# EAGLE board Bridge (EAGLE 9.2.2)
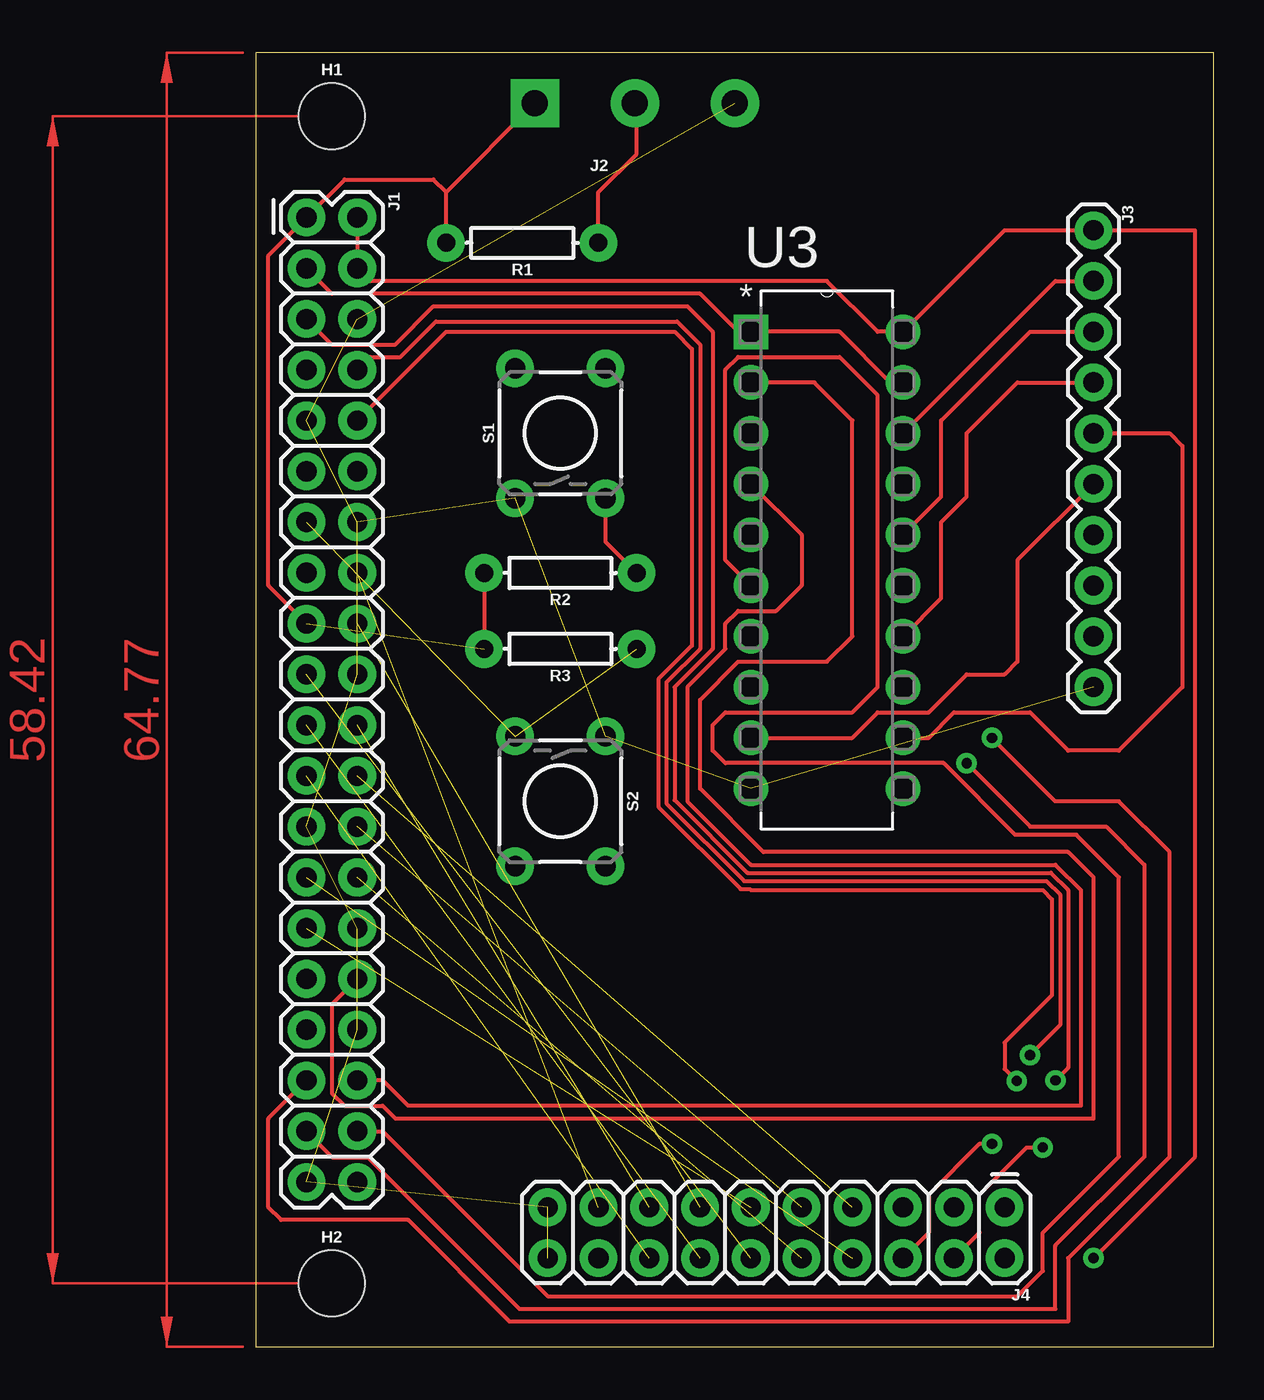
[diagram p0: board, top side]
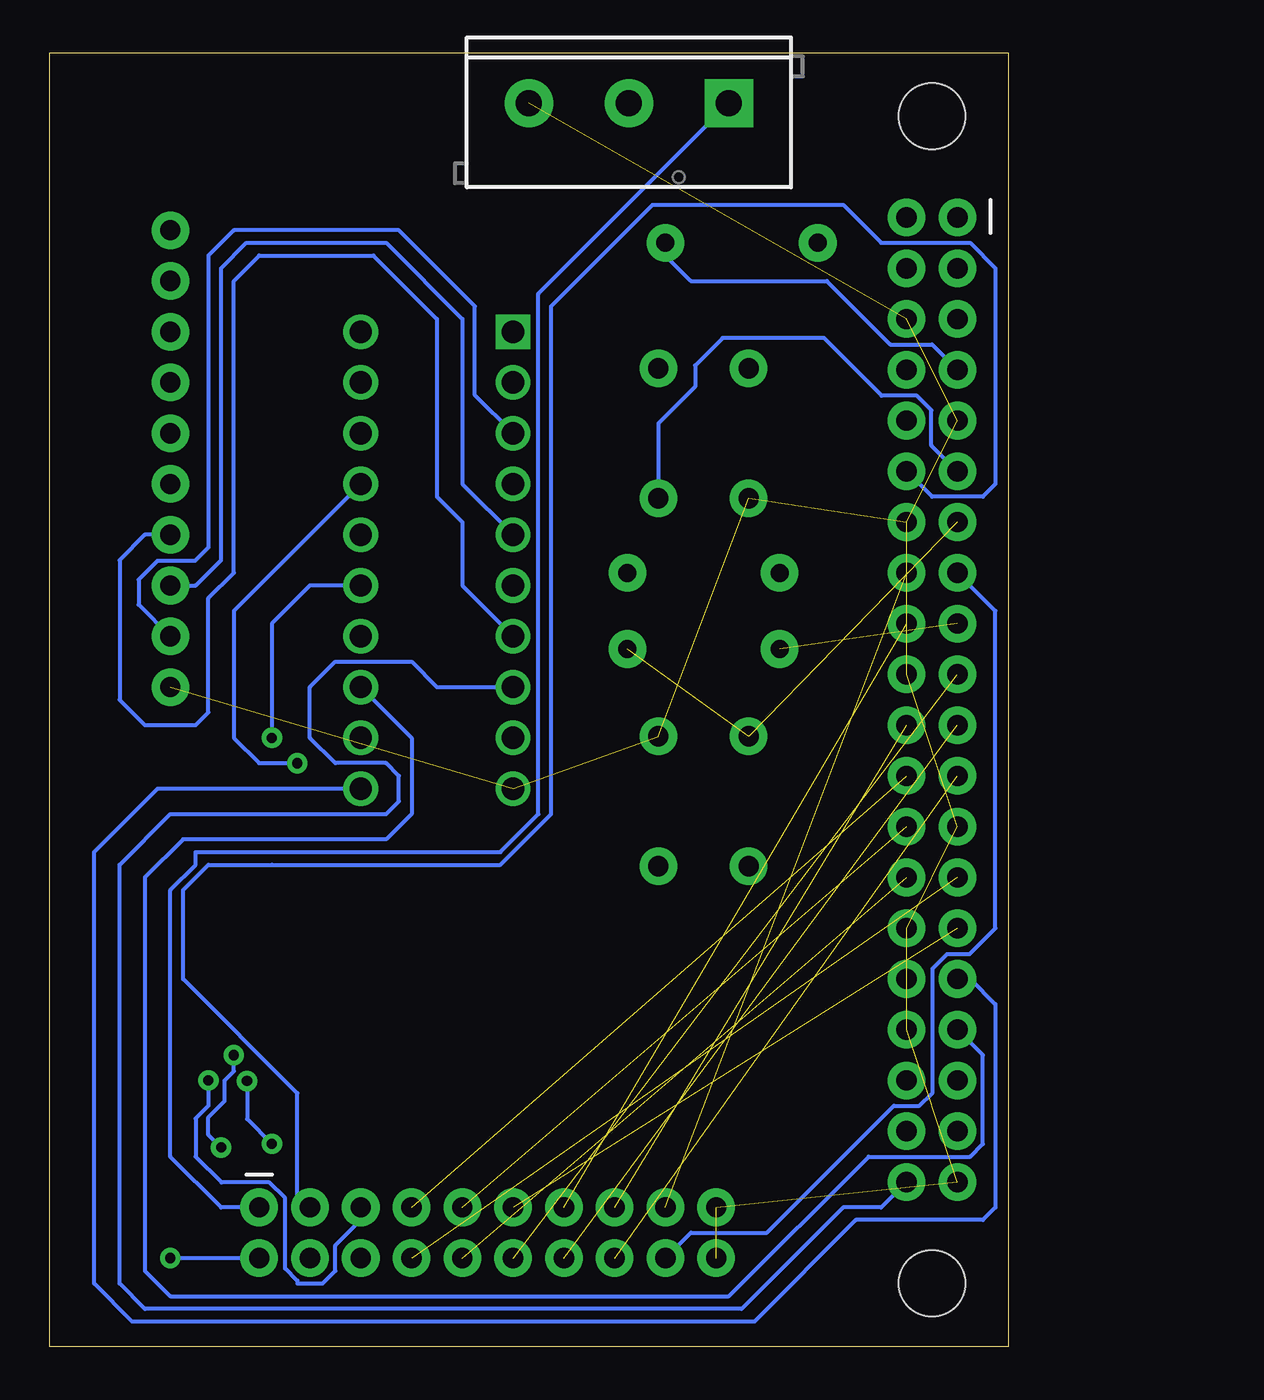
[diagram p1: board, bottom side, seen from below]

Size 47.93 x 64.76 mm. Coordinates in mm from the lower left corner, seen from the top.
Outline: 0,0 47.93,0 47.93,64.76 0,64.76 0,0
Copper layers (1*16): Top 0.035mm / dielectric 1.5mm / Bottom 0.035mm
Design rules "SparkFun": minimum track width 8mil, minimum drill 20mil, track to track 8mil, track to pad 8mil, pad to pad 8mil, via to via 8mil, smd to smd 8mil, copper to edge 8mil, drill to drill 8mil, minimum pad ring 12mil, minimum via ring 10mil, stop-mask expansion 4mil, vias tented up to drill 20mil, thermal gap 10mil

## Footprints (pad centres in the part's own frame; a part is rotated, then mirrored left to right if it is on the bottom)
STAND-OFF = hole 3.302: 0,0
2X20 = drill 1.016 pad 1.88: 1 0,0; 2 0,2.54; 3 2.54,0; 4 2.54,2.54; 5 5.08,0; 6 5.08,2.54; 7 7.62,0; 8 7.62,2.54; 9 10.16,0; 10 10.16,2.54; 11 12.7,0; 12 12.7,2.54; 13 15.24,0; 14 15.24,2.54; 15 17.78,0; 16 17.78,2.54; 17 20.32,0; 18 20.32,2.54; 19 22.86,0; 20 22.86,2.54; 21 25.4,0; 22 25.4,2.54; 23 27.94,0; 24 27.94,2.54; 25 30.48,0; 26 30.48,2.54; 27 33.02,0; 28 33.02,2.54; 29 35.56,0; 30 35.56,2.54; 31 38.1,0; 32 38.1,2.54; 33 40.64,0; 34 40.64,2.54; 35 43.18,0; 36 43.18,2.54; 37 45.72,0; 38 45.72,2.54; 39 48.26,0; 40 48.26,2.54
SCREWTERMINAL-5MM-3 = drill 1.3 pad 2.413 square: 1 0,0 | drill 1.3 pad 2.413: 2 5,0; 3 10,0
1X10 = drill 1.016 pad 1.88: 1 0,0; 2 2.54,0; 3 5.08,0; 4 7.62,0; 5 10.16,0; 6 12.7,0; 7 15.24,0; 8 17.78,0; 9 20.32,0; 10 22.86,0
2X10 = drill 1.016 pad 1.88: 1 0,0; 2 0,2.54; 3 2.54,0; 4 2.54,2.54; 5 5.08,0; 6 5.08,2.54; 7 7.62,0; 8 7.62,2.54; 9 10.16,0; 10 10.16,2.54; 11 12.7,0; 12 12.7,2.54; 13 15.24,0; 14 15.24,2.54; 15 17.78,0; 16 17.78,2.54; 17 20.32,0; 18 20.32,2.54; 19 22.86,0; 20 22.86,2.54
AXIAL-0.3 = drill 0.9 pad 1.88: P$1 -3.81,0; P$2 3.81,0
TACTILE_SWITCH_PTH_6.0MM = drill 1.016 pad 1.88: 1 -3.251,2.261; 2 3.251,2.261; 3 -3.251,-2.261; 4 3.251,-2.261
DIP254P762X508-20 = drill 1.118 square: 1 -7.62,22.86 | drill 1.118: 2 -7.62,20.32; 3 -7.62,17.78; 4 -7.62,15.24; 5 -7.62,12.7; 6 -7.62,10.16; 7 -7.62,7.62; 8 -7.62,5.08; 9 -7.62,2.54; 10 -7.62,0; 11 0,0; 12 0,2.54; 13 0,5.08; 14 0,7.62; 15 0,10.16; 16 0,12.7; 17 0,15.24; 18 0,17.78; 19 0,20.32; 20 0,22.86

## Placement (x,y rotation side)
H1  STAND-OFF  [STAND-OFF]  3.81,61.59 0 top
H2  STAND-OFF  [STAND-OFF]  3.81,3.17 0 top
J1  CONN_20X2  [2X20]  2.54,56.52 270 top
J2  [SCREWTERMINAL-5MM-3]  13.97,62.23 180 bottom
J3  [1X10]  41.91,55.88 270 top
J4  [2X10]  37.47,6.99 180 top
R1  4.7K  [AXIAL-0.3]  13.34,55.24 180 top
R2  4.7K  [AXIAL-0.3]  15.24,38.73 180 top
R3  4.7K  [AXIAL-0.3]  15.24,34.92 180 top
S1  MOMENTARY-SWITCH-SPST-PTH-6.0MM  [TACTILE_SWITCH_PTH_6.0MM]  15.24,45.72 90 top
S2  MOMENTARY-SWITCH-SPST-PTH-6.0MM  [TACTILE_SWITCH_PTH_6.0MM]  15.24,27.3 270 top
U3  SN74LS244N  [DIP254P762X508-20]  32.38,27.94 0 top

## Library data of the parts
H1 H2 = SparkFun-Hardware
J1 J4 = SparkFun-Connectors
J2 = SparkFun-Connectors; PROD_ID: CONN-10134; SF_SKU: PRT-08433
J3 = SparkFun-Connectors; PROD_ID: CONN-11563
R1-R3 = SparkFun-Resistors
S1 S2 = SparkFun-Switches; PROD_ID: SWCH-08441; SF_SKU: COM-00097
U3 = Texas Instruments_By_element14_Batch_1; MPN: SN74LS244N; OC_FARNELL: 1739688; OC_NEWARK: 60K6872; PACKAGE: PDIP-20; SUPPLIER: Texas Instruments

## Nets
1A1: J1.32 U3.2
1A2: J1.36 U3.4
1A3: J1.38 U3.6
1A4: J1.40 U3.8
1Y1: J3.2 U3.18
1Y2: J3.3 U3.16
1Y3: J3.4 U3.14
1Y4: J3.5 U3.12
2A1: J1.31 U3.11
2A2: J1.33 U3.13
2A3: J1.35 U3.15
2A4: J1.37 U3.17
2Y1: J3.6 U3.9
2Y2: J3.7 U3.7
2Y3: J3.8 U3.5
2Y4: J3.9 U3.3
3.3V: J1.1 J1.17 J2.1 J4.1 R1.P$2 R2.P$2 R3.P$2
5V: J1.2 J1.4 J3.1 J4.2 U3.20
!BTN1: J1.11 R2.P$1 S1.3
!OE: J1.3 U3.1 U3.19
!PWR_OFF: J1.13 R3.P$1 S2.3
BCM0: J1.27 J4.8
BCM1: J1.28 J4.10
BCM3: J1.5 J4.5
BCM5: J1.29 J4.11
BCM7: J1.26 J4.9
BCM8: J1.24 J4.7
BCM9: J1.21 J4.14
BCM10: J1.19 J4.12
BCM11: J1.23 J4.16
BCM14: J1.8 J4.4
BCM15: J1.10 J4.6
BCM18: J1.12 J4.3
BCM22: J1.15 J4.18
BCM23: J1.16 J4.17
BCM24: J1.18 J4.13
BCM25: J1.22 J4.15
DQ: J1.7 J2.2 R1.P$1
GND: J1.6 J1.9 J1.14 J1.20 J1.25 J1.30 J1.34 J1.39 J2.3 J3.10 J4.19 J4.20 S1.1 S2.1 U3.10

## Tracks (layer width: path | path; a pad name or v marks a point on that pad's centre or on a via)
1A1
  Top 0.203: J1.32 3.81,17.14 3.81,12.7 4.45,12.06 6.35,12.06 6.99,11.43 41.91,11.43 41.91,23.5 40.64,24.77 25.4,24.77 22.23,27.94 22.23,32.38 24.13,34.29 28.57,34.29 29.84,35.56 29.84,46.35 27.94,48.26 U3.2
1A2
  Top 0.203: U3.4 27.3,40.64 27.3,38.1 26.04,36.83 24.13,36.83 23.5,36.2 23.5,34.92 21.59,33.02 21.59,27.3 24.77,24.13 40.01,24.13 41.27,22.86 41.27,12.06 7.62,12.06 6.35,13.34 J1.36
1A3
  Top 0.203: J1.38 6.35,10.79 14.61,2.54 38.1,2.54 39.37,3.81 39.37,5.71 43.18,9.53 43.18,23.5 41.05,25.63 37.99,25.63 34.41,29.21 23.5,29.21 22.86,29.84 22.86,31.11 23.5,31.75 29.84,31.75 31.11,33.02 31.11,47.62 29.21,49.53 24.13,49.53 23.5,48.9 23.5,39.37 U3.6
1A4
  Bottom 0.203: J1.40 6.35,6.99 8.26,6.99 13.34,1.91 43.18,1.91 44.45,3.17 44.45,24.13 41.91,26.67 31.11,26.67 30.48,27.3 30.48,28.57 31.11,29.21 33.66,29.21 34.92,30.48 34.92,33.02 33.66,34.29 29.84,34.29 28.57,33.02 U3.8
1Y1
  Top 0.203: U3.18 40.01,53.34 J3.2
1Y2
  Top 0.203: U3.16 34.29,42.55 34.29,46.35 38.73,50.8 J3.3
1Y3
  Top 0.203: U3.14 34.29,37.47 34.29,41.27 35.56,42.55 35.56,45.72 38.1,48.26 J3.4
1Y4
  Top 0.203: J3.5 45.72,45.72 46.35,45.09 46.35,33.02 43.18,29.84 40.64,29.84 38.73,31.75 34.92,31.75 33.66,30.48 U3.12
2A1
  Bottom 0.203: J1.31 1.91,18.41 0.64,17.14 0.64,6.99 1.27,6.35 7.62,6.35 12.7,1.27 43.81,1.27 45.72,3.17 45.72,24.77 42.55,27.94 U3.11
2A2
  Bottom 0.203: U3.13 29.84,30.48 29.84,26.67 31.11,25.4 41.27,25.4 43.18,23.5 43.18,3.81 41.91,2.54 13.97,2.54 6.99,9.53 1.91,9.53 1.27,10.16 1.27,14.61 J1.33
2A3  (via drill 0.51)
  Top 0.203: v36.83,30.48 40.01,27.3 43.18,27.3 45.72,24.77 45.72,9.53 40.64,4.45 40.64,1.27 12.7,1.27 7.62,6.35 1.27,6.35 0.64,6.99 0.64,11.43 J1.35
  Bottom 0.203: U3.15 34.92,38.1 36.83,36.2 v36.83,30.48
2A4  (via drill 0.51)
  Top 0.203: J1.37 3.83,9.5 5.6,9.5 13.19,1.91 40.01,1.91 40.01,5.08 44.45,9.53 44.45,24.13 42.55,26.04 38.73,26.04 v35.56,29.21
  Bottom 0.203: U3.17 38.73,36.83 38.73,30.48 37.47,29.21 v35.56,29.21
2Y1
  Top 0.203: J3.6 38.1,39.37 38.1,34.29 37.47,33.66 35.56,33.66 33.66,31.75 31.11,31.75 29.84,30.48 U3.9
2Y2
  Bottom 0.203: J3.7 43.18,40.64 44.45,39.37 44.45,32.38 43.18,31.11 40.64,31.11 40.01,31.75 40.01,37.47 38.73,38.73 38.73,53.34 37.47,54.61 31.75,54.61 28.57,51.44 28.57,42.55 27.3,41.27 27.3,38.1 U3.7
2Y3
  Bottom 0.203: J3.8 40.64,38.1 39.37,39.37 39.37,53.98 38.1,55.24 31.11,55.24 27.3,51.44 27.3,43.18 U3.5
2Y4
  Bottom 0.203: J3.9 43.5,37.15 43.5,38.39 42.55,39.34 40.66,39.34 40.01,40.01 40.01,54.61 38.73,55.88 30.48,55.88 26.67,52.07 26.67,47.62 U3.3
3.3V  (1 unrouted)
  Top 0.203: 9.53,57.78 J2.1 | 9.53,57.78 8.89,58.42 4.45,58.42 J1.1 0.64,54.61 0.64,38.1 J1.17 | R1.P$2 9.53,57.78 | R2.P$2 R3.P$2
  Bottom 0.203: J4.1 39.37,6.99 41.91,9.53 41.91,22.86 40.64,24.13 40.64,24.77 25.4,24.77 23.5,26.67 23.5,52.7 J2.1
5V  (via drill 0.51)
  Top 0.203: J1.2 J1.4 5.71,53.34 28.57,53.34 31.11,50.8 U3.20 37.47,55.88 J3.1 46.99,55.88 46.99,9.53 v41.91,4.45
  Bottom 0.203: J4.2 v41.91,4.45
!BTN1
  Top 0.203: R2.P$1 17.5,40.28 S1.3
  Bottom 0.203: J1.11 3.83,45.11 3.83,46.87 4.56,47.6 6.33,47.6 9.21,50.48 14.29,50.48 15.66,49.11 15.66,48.05 17.5,46.21 S1.3
!OE
  Top 0.203: J1.3 3.81,52.7 22.23,52.7 24.13,50.8 U3.1 29.21,50.8 31.75,48.26 U3.19
!PWR_OFF  (2 unrouted)
BCM0  (1 unrouted)
BCM1  (1 unrouted)
BCM3  (via drill 0.51)
  Top 0.203: J1.5 3.81,50.16 6.99,50.16 8.89,52.07 21.59,52.07 22.86,50.8 22.86,34.92 20.95,33.02 20.95,27.36 24.6,23.72 39.78,23.72 40.64,22.86 40.64,13.97 v40.01,13.34
  Bottom 0.203: J4.5 32.38,6.35 33.66,5.08 33.66,3.81 34.29,3.17 35.56,3.17 35.56,3.32 36.17,3.93 36.17,7.45 36.95,8.23 39.34,8.23 40.64,9.53 40.64,11.43 40.01,12.06 v40.01,13.34
BCM5  (1 unrouted)
BCM7  (1 unrouted)
BCM8  (1 unrouted)
BCM9  (1 unrouted)
BCM10  (1 unrouted)
BCM11  (1 unrouted)
BCM14  (via drill 0.51)
  Top 0.203: J1.8 5.71,49.53 7.24,49.53 9.02,51.31 21.08,51.31 22.23,50.16 22.23,34.92 20.55,33.25 20.55,27.2 24.43,23.32 39.55,23.32 40.23,22.63 40.23,16.1 v38.73,14.61 | J4.4 36.2,5.71 36.2,7.62 38.56,9.98 v39.37,9.98
  Bottom 0.203: v39.37,9.98 40.01,10.62 40.01,11.49 39.19,12.3 39.19,13.34 38.73,13.79 v38.73,14.61
BCM15  (via drill 0.51)
  Top 0.203: J1.10 9.53,50.8 20.95,50.8 21.82,49.94 21.82,35.09 20.14,33.42 20.14,27.03 24.26,22.91 24.71,22.91 24.77,22.86 39.37,22.86 39.83,22.4 39.83,17.6 37.47,15.24 37.47,13.91 v38.07,13.31 | v36.83,10.16 36.2,10.16 33.66,7.62 33.66,5.71 J4.6
  Bottom 0.203: v38.07,13.31 38.07,11.4 v36.83,10.16
BCM18
  Bottom 0.203: J4.3 35.56,7.62 35.56,12.7 41.27,18.41 41.27,22.86 40.01,24.13 36.83,24.13 25.4,24.13 22.86,26.67 22.86,52.07 17.78,57.15 8.26,57.15 6.35,55.24 1.91,55.24 0.64,53.98 0.64,43.18 1.27,42.55 3.81,42.55 J1.12
BCM22
  Bottom 0.203: J4.18 15.88,5.71 12.06,5.71 5.71,12.06 4.45,12.06 3.79,12.72 3.79,18.93 3.06,19.66 1.93,19.66 0.64,20.95 0.64,36.83 J1.15
BCM23  (1 unrouted)
BCM24  (1 unrouted)
BCM25  (1 unrouted)
DQ
  Top 0.203: R1.P$1 17.14,57.78 19.05,59.69 19.05,62.15 J2.2
  Bottom 0.203: R1.P$1 17.14,54.61 15.88,53.34 9.07,53.34 5.89,50.16 3.81,50.16 J1.7
GND  (14 unrouted)
(copper drawn outside any net)
  shapes: Top area x2